# Allegro board GW_LORA.brd
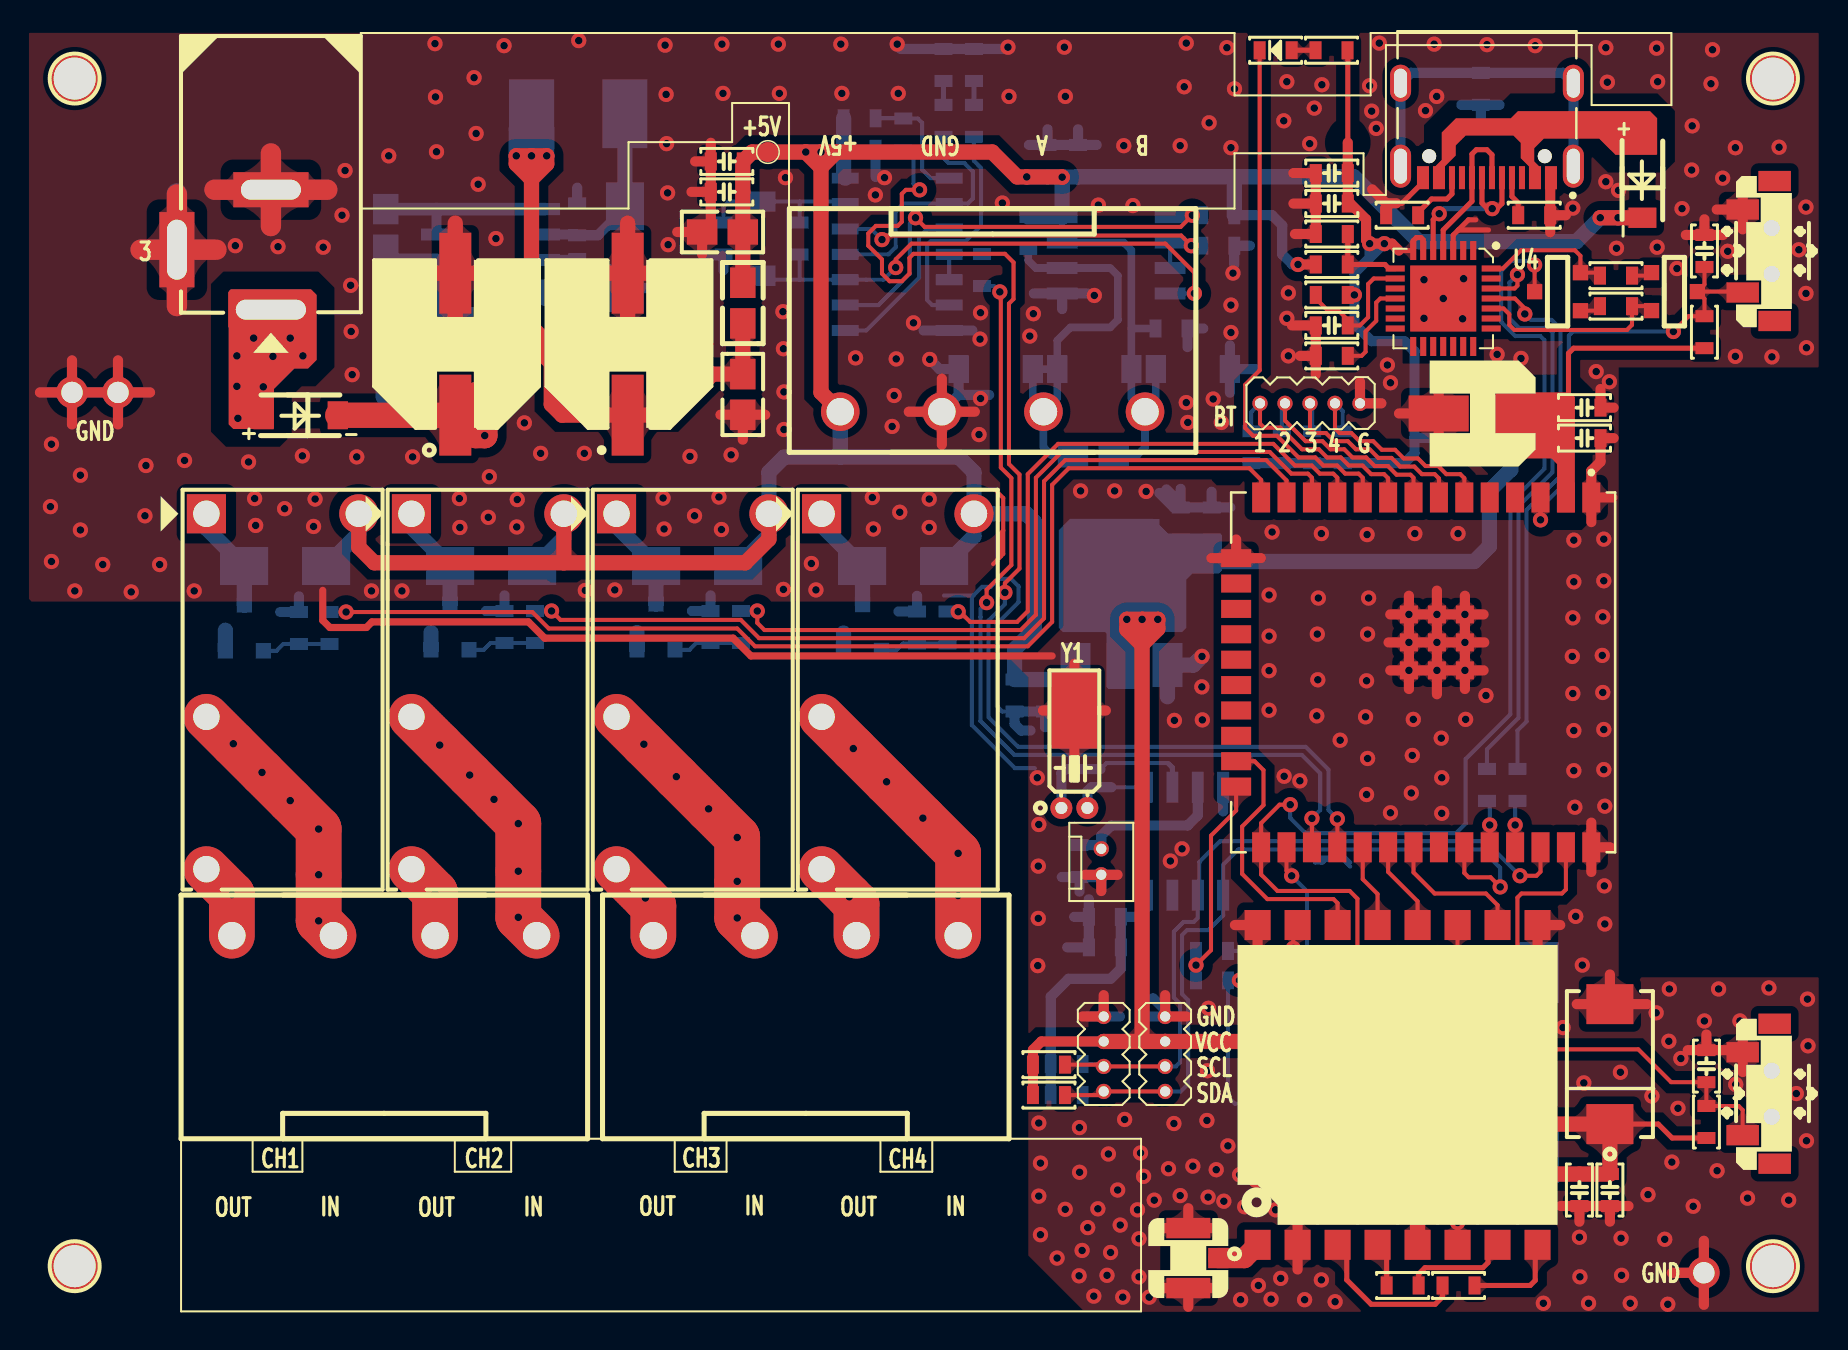
[diagram p0: board, top side]
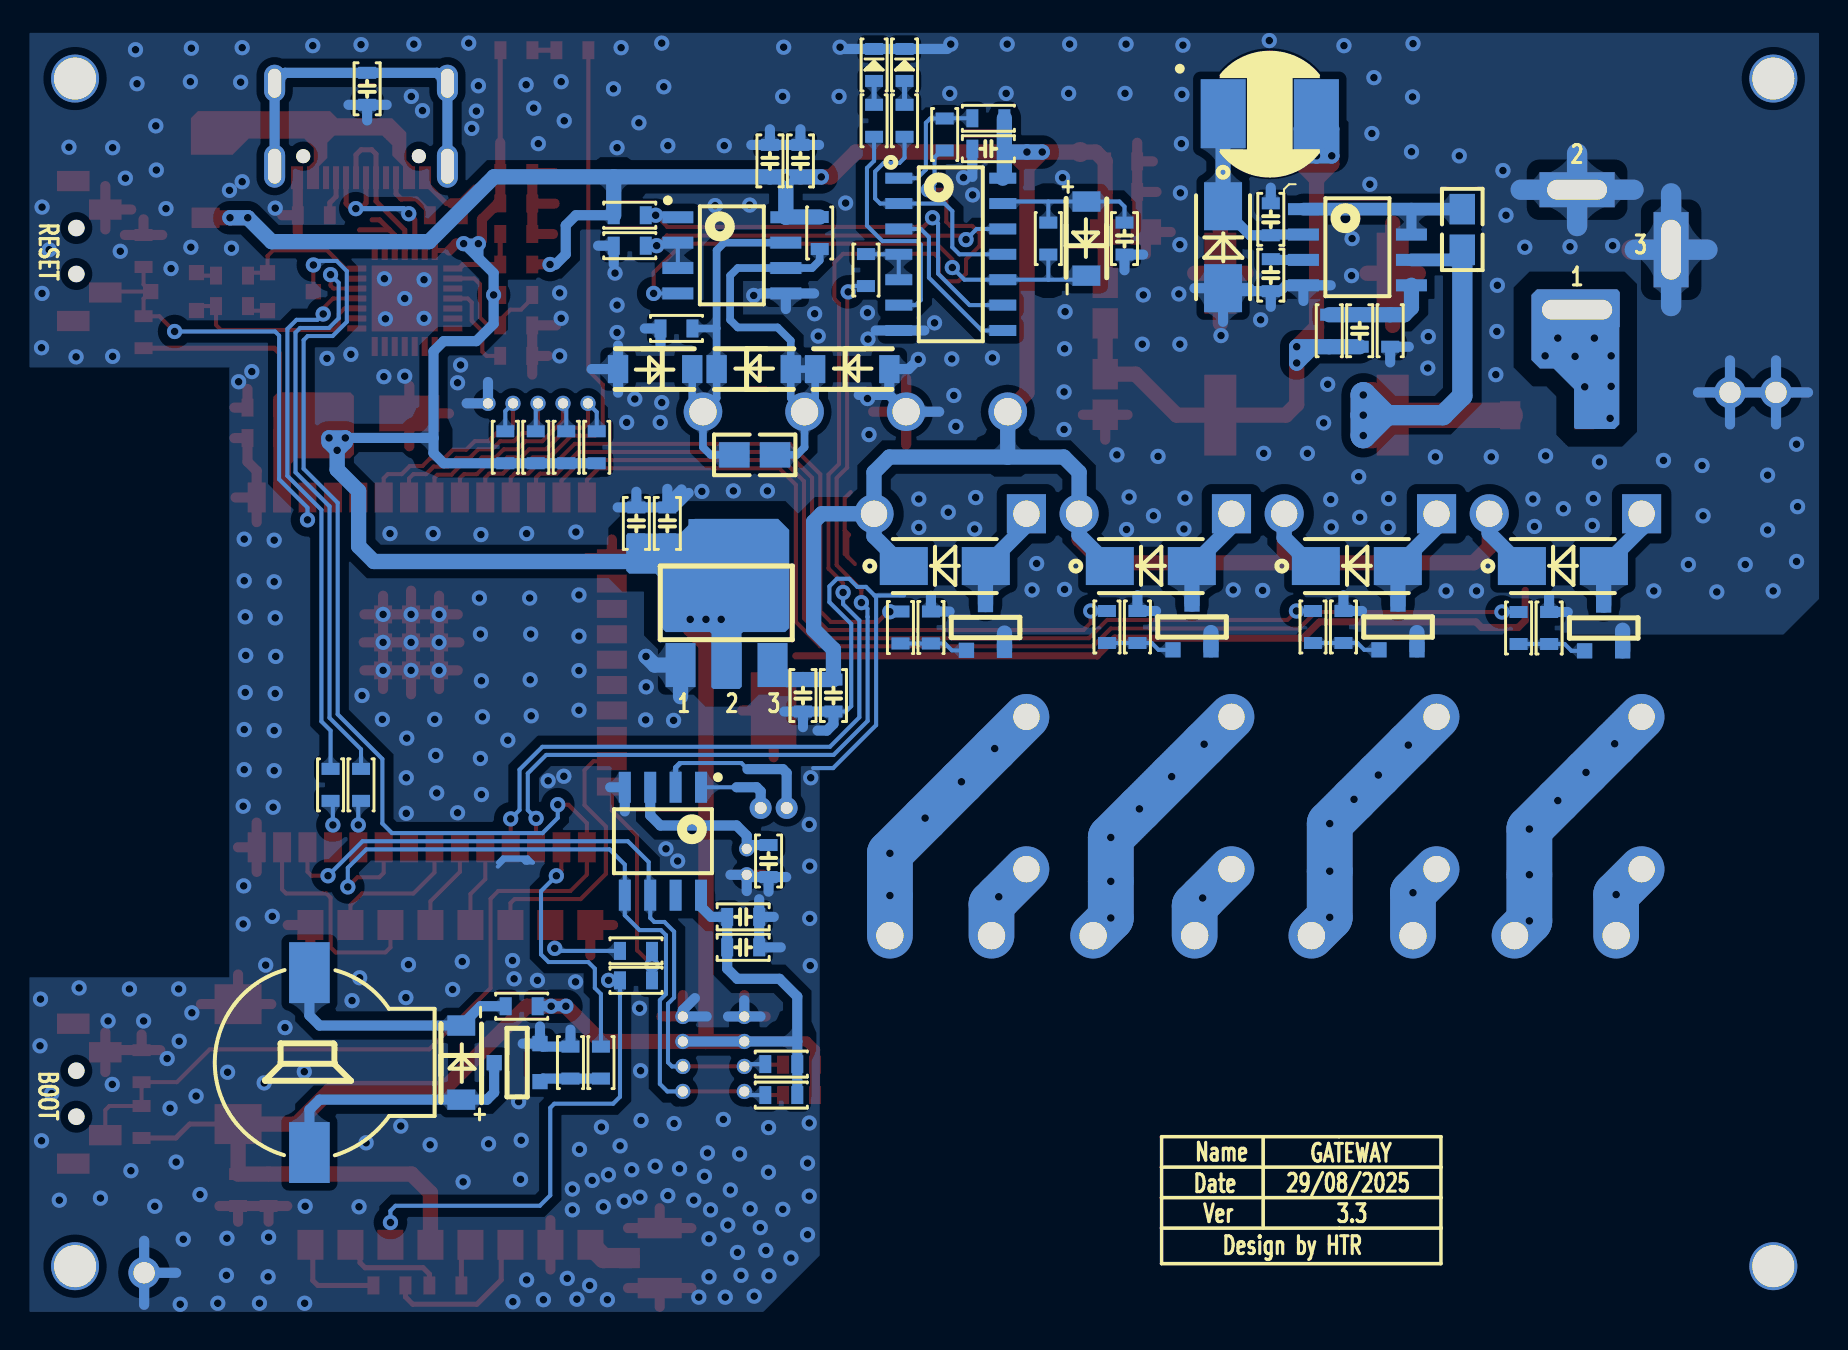
[diagram p1: board, bottom side, seen from below]

No outline. copper layers: TOP, BOTTOM. Coordinates in mm from the lowest, leftmost part position.

## Design rules (mm)
constraint set DEFAULT: min track width 0.203

## Placement (name value [footprint] x y rotation side)
B1  Through SMD  [BUZZER_SMD]  75.74 12.73 270 bottom
C1  0.1uF  [C0603]  52.71 57.84 90 bottom
C2  0.1uF  [C0603]  51.19 57.84 90 bottom
C3  1uF  [C0603]  41.79 58.45 0 bottom
C4  33pF  [C0603]  34.98 53.95 270 bottom
C6  1uF  [C0603]  78.04 43.97 0 top
C7  0.1uF  [C0603]  78.04 45.49 0 top
C8  0.1uF  [C0603]  84.03 53.33 90 top
C9  0.1uF  [C0603]  84.13 12.55 90 top
C10  1uF  [C0603]  65.4 55.7 180 top
C11  0.1uF  [C0603]  65.4 57.23 180 top
C12  0.1uF  [C0603]  72.85 61.44 270 bottom
C13  0.1uF  [C0603]  65.4 49.61 180 top
C14  0.1uF  [C0603]  77.78 6.35 270 top
C15  1uF  [C0603]  79.31 6.35 270 top
C16  100uF  [C2312]  79.31 12.65 90 top
C17  470uF  [RAD_SIZE_F]  30.19 48.67 90 top
C18  10uF  [C0805]  35.95 46.15 0 top
C19  10uF  [C0805]  34.93 54.28 270 top
C20  0.1uF  [C0603]  35.15 56.29 180 top
C21  0.001uF  [C0603]  35.15 57.81 180 top
C22  470pF  [C0603]  27.67 54.91 90 bottom
C23  100pF  [C0603]  23.22 49.34 90 bottom
C24  470pF  [C0603]  27.67 52.12 270 bottom
C25  0.1uF  [C0603]  49.54 31.09 270 bottom
C26  1uF  [C0603]  51.06 31.09 270 bottom
C27  0.1uF  [C0603]  59.39 39.7 90 bottom
C28  1uF  [C0603]  57.84 39.7 90 bottom
C29  10uF  [RAD_SIZE_C]  72.94 45.2 180 top
C30  0.1uF  [C0603]  54.05 20.02 180 bottom
C31  470uF  [RAD_SIZE_F]  21.57 48.67 90 top
C32  1uF  [C0603]  54.05 18.49 0 bottom
C33  1uF  [C0603]  52.78 22.81 270 bottom
D4  1N4148  [SOD_123]  36.89 53.95 270 bottom
D5  0603  [D0603]  47.51 62.64 90 bottom
D6  0603  [D0603]  45.98 62.64 90 bottom
D7  1N4148  [SOD_123]  80.93 56.85 270 top
D8  1N4148  [SOD_123]  13.84 45.11 0 top
D9  RB050L  [DO_214AC]  30.06 53.52 270 bottom
D10  0805  [D0603]  62.59 63.37 180 top
D11  1N4148  [SOD_123]  68.15 12.73 90 bottom
D12  1N4007WDITR  [DO_214AC]  13.06 37.57 180 bottom
D13  1N4007WDITR  [DO_214AC]  33.67 37.57 180 bottom
D14  1N4007WDITR  [DO_214AC]  23.37 37.57 180 bottom
D15  1N4007WDITR  [DO_214AC]  43.97 37.57 180 bottom
D16  1N4148  [SOD_123]  48.6 47.42 0 bottom
D17  1N4148  [SOD_123]  58.45 47.42 180 bottom
D18  1N4148  [SOD_123]  53.53 47.42 0 bottom
J2  DC_Jack  [CON_PJ-002A]  12.35 50.39 270 top
J3  HEADER1X4  [HEADER1X4_125]  57.07 13.16 90 top
J4  HEADER1X4  [HEADER1X4_125]  54 13.16 90 top
J5  Domino4PinRA  [DOMINO4_200_RA]  18.02 19.08 0 top
J6  Domino4PinRA  [DOMINO4_200_RA]  48.44 45.29 180 top
J7  Domino4PinRA  [DOMINO4_200_RA]  39.09 19.08 0 top
J8  TYPE C  [TYPE-C-16P]  73.16 61.72 180 top
J9  Bat  [HEADER1X2_127_ZH_TH]  53.87 22.12 270 top
J10  HEADER1X5  [HEADER1X5_125]  64.31 45.71 0 top
L1  100uH  [CHOKESIZE6MM]  27.72 60.2 180 bottom
L2  100MHz/100Ohm  [L0805]  35.95 49.71 180 top
NOREF  -  []  0 64.5 0 top
NOREF#2  -  [unnamed#2]  2.54 2.54 0 top
NOREF#3  -  []  0 0 90 top
NOREF#4  -  [unnamed#2]  2.54 61.96 0 top
NOREF#5  -  [unnamed#2]  87.46 61.96 0 top
NOREF#6  -  [unnamed#2]  87.46 2.54 0 top
Q1  MMBT2222  [SOT_23]  81.39 52.25 270 top
Q2  MMBT2222  [SOT_23]  77.83 50.34 90 top
Q3  MMBT2222  [SOT_23]  64.21 11.77 90 bottom
Q4  MMBT2222  [SOT_23]  11.98 33.32 180 bottom
Q5  MMBT2222  [SOT_23]  32.56 33.38 180 bottom
Q6  MMBT2222  [SOT_23]  22.26 33.38 180 bottom
Q7  MMBT2222  [SOT_23]  42.88 33.35 180 bottom
R1  120  [R0805]  53.47 43.13 90 bottom
R2  10K  [R0603]  59.72 55.12 180 bottom
R3  10K  [R0603]  50.22 54.23 270 bottom
R4  10K  [R0603]  59.72 53.59 0 bottom
R5  10K  [R0603]  57.39 49.45 0 bottom
R6  10K  [R0603]  41.79 59.97 0 bottom
R7  56K  [R0603]  38.79 53.95 270 bottom
R8  2.2K  [R0603]  47.51 59.84 90 bottom
R9  2.2K  [R0603]  45.98 59.84 90 bottom
R10  0  [R0603]  74.68 26.62 90 bottom
R11  10K  [R0603]  84.03 49.27 270 top
R12  10K  [R0603]  84.13 9.75 270 top
R13  0  [R0603]  73.16 26.62 90 bottom
R14  10K  [R0603]  79.61 52.1 0 top
R15  10K  [R0603]  79.61 50.57 0 top
R16  10K  [R0603]  65.4 52.65 0 top
R17  10K  [R0603]  65.4 48.08 0 top
R18  10K  [R0603]  65.4 54.18 180 top
R19  1K  [R0603]  65.4 51.13 0 top
R20  0  [R0603]  43.97 59.16 90 bottom
R21  0  [R0603]  47.91 52.37 90 bottom
R22  0  [R0603]  59.41 18.31 180 bottom
R23  0  [R0603]  68.94 1.57 0 top
R24  0  [R0603]  71.74 1.57 0 top
R25  0  [R0603]  59.41 16.84 0 bottom
R26  0.33  [R0805]  18.09 54.41 0 bottom
R27  4.7K  [R0603]  24.75 49.34 90 bottom
R28  1.5K  [R0603]  21.7 49.34 270 bottom
R29  4k7  [R0603]  51.26 12.62 0 top
R30  4k7  [R0603]  51.26 11.1 0 top
R31  10K  [R0603]  52.15 11.1 0 bottom
R32  2.2K  [R0603]  65.39 63.37 180 top
R33  10  [R0603]  65.13 15.54 0 bottom
R34  2k2  [R0603]  61.16 12.73 270 bottom
R35  10K  [R0603]  62.69 12.73 90 bottom
R36  RELAY_G6B  [RELAY_SPST_20MX10MX10M]  12.94 31.29 270 top
R37  2k2  [R0603]  15.28 34.47 90 bottom
R38  10K  [R0603]  13.75 34.47 90 bottom
R39  RELAY_G6B  [RELAY_SPST_20MX10MX10M]  33.44 31.29 270 top
R40  2k2  [R0603]  35.86 34.52 90 bottom
R41  10K  [R0603]  34.34 34.52 90 bottom
R42  RELAY_G6B  [RELAY_SPST_20MX10MX10M]  23.19 31.29 270 top
R43  2k2  [R0603]  25.56 34.52 90 bottom
R44  10K  [R0603]  24.04 34.52 90 bottom
R45  RELAY_G6B  [RELAY_SPST_20MX10MX10M]  43.7 31.29 270 top
R46  2k2  [R0603]  46.19 34.49 90 bottom
R47  10K  [R0603]  44.66 34.49 90 bottom
R48  5.1K  [R0603]  75.52 55.12 0 top
R49  5.1K  [R0603]  68.92 55.12 180 top
R50  10K  [R0603]  61.37 43.51 90 bottom
R51  10K  [R0603]  62.9 43.51 90 bottom
R52  10K  [R0603]  64.42 43.51 90 bottom
R53  10K  [R0603]  65.95 43.51 90 bottom
R54  10K  [R0603]  52.15 12.65 0 bottom
SW1  BUTTON  [BUTTON_SMD_2PIN_3X6X3_5_RA]  87.4 11.17 270 top
SW2  BUTTON  [BUTTON_SMD_2PIN_3X6X3_5_RA]  87.4 53.33 270 top
T3  +5V  [TESTPOINT_SIG]  37.2 58.28 0 top
T5  GND  [TEST_POINT_PWR]  2.41 46.25 0 top
T6  GND  [TEST_POINT_PWR]  4.71 46.25 0 top
T7  GND  [TEST_POINT_PWR]  84.01 2.21 0 top
U1  SN75176B  [SOIC8]  54.62 53.11 180 bottom
U2  74HC04D  [SOIC_14]  43.67 53.16 180 bottom
U3  -  [ESP32_WROOM_32U]  69.97 32.25 270 top
U4  CP2102  [QFN28_5X5]  70.97 50.95 270 top
U5  SMD_MINI  [ANTENNA_MOUNT]  58.22 2.95 0 top
U6  RFM98_433/RFM22B_433  [RFM22B_S2]  68.69 11.61 90 top
U7  MC34063  [SOIC8]  23.34 53.52 180 bottom
U8  AMS1117-3V3  [SOT_223_3]  57.18 32.61 180 bottom
U9  BQ32000  [SOIC8]  58.06 23.8 270 bottom
Y1  32.768kHz  [CRYTAL32KHZ]  52.53 25.46 0 top

## Library data of the parts
B1 = BUZZER
C1-C4 C6-C15 C20-C28 C30 C32 C33 = NPOL_CAP: User Part Number: ***
C16 C17 C29 C31 = POL_CAP
C18 C19 = NPOL_CAP
D4 D7 D8 D11 D16-D18 = DIODE
D5 D6 D10 = LED: User Part Number: ***
D9 D12-D15 = DIODE_AC
J2 = PWR_DC_TH
J3-J7 = HEADER1X4
J8 = TYPE_C_0
J9 = HEADER1X2
J10 = HEADER1X5
L1 = IND_FERRITE
L2 = BEAD: User Part Number: ***
Q1-Q7 = BJT_NPN
R1 R26 = RES
R2-R25 R27-R35 R37 R38 R40 R41 R43 R44 R46-R54 = RES: User Part Number: ***
R36 R39 R42 R45 = RELAY_G6B_0
SW1 SW2 = SW_PUSHBUTTON_SPST_2P
T3 T5-T7 = TestPoint
U1 = SN65176_2
U2 = 74HC04
U3 = ESP32_WROOM_32U
U4 = CP2102_QFN28_0
U5 = ANT_SMD_MINI
U6 = RFM69HCW
U7 = MC34063_2
U8 = LM1117X_4P
U9 = DS1307_8P
Y1 = XM_SM_2

## Footprints (pads in the part's own frame, mm; a bottom-side part is the same pattern mirrored in y, then rotated)
ANTENNA_MOUNT
  rect 2.2x1.021 smd: 1(0,1.5) 2(0,-1.5)
  rect 1.016x1.016 smd: 3(1.5,0)
BUTTON_SMD_2PIN_3X6X3_5_RA
  round 0.838 hole 0.813: (-1.15,0) (1.15,0)
  rect 1.016x1.626 smd: 1(-2.075,-1.45) 2(2.075,-1.45) 3(-3.5,0.15) 4(3.5,0.15)
BUZZER_SMD
  rect 3.048x2.032 smd: 1(-4.5,0) 2(4.5,0)
C0603
  rect 0.599x0.899 smd: 1(-0.8,0) 2(0.8,0)
C0805
  rect 1.27x1.524 smd: 1(0,1.016) 2(0,-1.016)
C2312
  rect 1.999x2.349 smd: 1(-3,0) 2(3,0)
CHOKESIZE6MM
  rect 2.25x3.449 smd: 1(-2.33,0) 2(2.33,0)
CON_PJ-002A
  rect 1.753x4.267 hole 0.991x3.505: 1(0,0)
  rect 1.753x3.759 hole 0.991x2.997: 2(-6,0)
  rect 3.759x1.753 hole 2.997x0.991: 3(-3,-4.7)
CRYTAL32KHZ
  round 1.1 hole 0.599: 1(-0.65,0) 2(0.65,0)
  rect 2.286x3.81 smd: 3(0,4.877)
D0603
  rect 0.599x0.899 smd: 1(-0.8,0) 2(0.8,0)
DO_214AC
  rect 2.4x1.9 smd: A(2.05,0) C(-2.05,0)
DOMINO4_200_RA
  round 1.93 hole 1.372: 1(-7.62,0) 2(-2.54,0) 3(2.54,0) 4(7.62,0)
ESP32_WROOM_32U
  rect 1.5x0.9 smd: 1(-8.75,8.41) 2(-8.75,7.14) 3(-8.75,5.87) 4(-8.75,4.6) 5(-8.75,3.33) 6(-8.75,2.06) 7(-8.75,0.79) 8(-8.75,-0.48) 9(-8.75,-1.75) 10(-8.75,-3.02) 11(-8.75,-4.29) 12(-8.75,-5.56) 13(-8.75,-6.83) 14(-8.75,-8.1) 25(8.75,-8.1) 26(8.75,-6.83) 27(8.75,-5.56) 28(8.75,-4.29) 29(8.75,-3.02) 30(8.75,-1.75) 31(8.75,-0.48) 32(8.75,0.79) 33(8.75,2.06) 34(8.75,3.33) 35(8.75,4.6) 36(8.75,5.87) 37(8.75,7.14) 38(8.75,8.41)
  rect 0.9x1.5 smd: 15(-5.715,-9.35) 16(-4.445,-9.35) 17(-3.175,-9.35) 18(-1.905,-9.35) 19(-0.635,-9.35) 20(0.635,-9.35) 21(1.905,-9.35) 22(3.175,-9.35) 23(4.445,-9.35) 24(5.715,-9.35)
  rect 0.9x0.9 smd: 39_1(-2.9,2.09) 39_2(-1.5,2.09) 39_3(-0.1,2.09) 39_4(-2.9,0.69) 39_5(-1.5,0.69) 39_6(-0.1,0.69) 39_7(-2.9,-0.71) 39_8(-1.5,-0.71) 39_9(-0.1,-0.71)
HEADER1X2_127_ZH_TH
  round 0.762 hole 0.508: 1(-1.305,0) 2(-0.005,0)
HEADER1X4_125
  round 0.762 hole 0.508: 1(-1.875,0) 2(-0.625,0) 3(0.625,0) 4(1.875,0)
HEADER1X5_125
  round 0.762 hole 0.508: 1(-2.5,0) 2(-1.25,0) 3(0,0) 4(1.25,0) 5(2.5,0)
L0805
  rect 1.27x1.524 smd: 1(0,0) 2(0,-2.032)
QFN28_5X5
  rect 0.95x0.305 smd: 1(-2.4,1.5) 2(-2.4,1) 3(-2.4,0.5) 4(-2.4,0) 5(-2.4,-0.5) 6(-2.4,-1) 7(-2.4,-1.5) 15(2.4,-1.5) 16(2.4,-1) 17(2.4,-0.5) 18(2.4,0) 19(2.4,0.5) 20(2.4,1) 21(2.4,1.5)
  rect 0.305x0.95 smd: 8(-1.5,-2.4) 9(-1,-2.4) 10(-0.5,-2.4) 11(0,-2.4) 12(0.5,-2.4) 13(1,-2.4) 14(1.5,-2.4) 22(1.5,2.4) 23(1,2.4) 24(0.5,2.4) 25(0,2.4) 26(-0.5,2.4) 27(-1,2.4) 28(-1.5,2.4)
  rect 3.302x3.302 smd: 29(0,0)
R0603
  rect 0.599x0.899 smd: 1(-0.8,0) 2(0.8,0)
R0805
  rect 1.27x1.524 smd: 1(0,1.016) 2(0,-1.016)
RAD_SIZE_C
  rect 3x1.8 smd: 1(-2.2,0) 2(2.2,0)
RAD_SIZE_F
  rect 4.049x1.6 smd: 1(-3.55,0) 2(3.55,0)
RELAY_SPST_20MX10MX10M
  rect 1.956x1.956 hole 1.321: 1(-8.89,-3.81)
  round 1.956 hole 1.321: 2(-8.89,3.81) 3(1.27,-3.81) 4(8.89,-3.81)
RFM22B_S2
  rect 1.501x1.301 smd: 1(-8,7) 2(-8,5) 3(-8,3) 4(-8,1) 5(-8,-1) 6(-8,-3) 7(-8,-5) 8(-8,-7) 9(8,-7) 10(8,-5) 11(8,-3) 12(8,-1) 13(8,1) 14(8,3) 15(8,5) 16(8,7)
SOD_123
  rect 1.016x1.397 smd: 1(-1.854,0) 2(1.854,0)
SOIC8
  rect 1.549x0.599 smd: 1(-2.7,1.905) 2(-2.7,0.635) 3(-2.7,-0.635) 4(-2.7,-1.905) 5(2.7,-1.905) 6(2.7,-0.635) 7(2.7,0.635) 8(2.7,1.905)
SOIC_14
  rect 1.349x0.551 smd: 1(-2.6,3.81) 2(-2.6,2.54) 3(-2.6,1.27) 4(-2.6,0) 5(-2.6,-1.27) 6(-2.6,-2.54) 7(-2.6,-3.81) 8(2.6,-3.81) 9(2.6,-2.54) 10(2.6,-1.27) 11(2.6,0) 12(2.6,1.27) 13(2.6,2.54) 14(2.6,3.81)
SOT_23
  rect 0.762x0.762 smd: 1(0,0) 2(1.9,0) 3(0.95,2.291)
SOT_223_3
  rect 1.5x2.2 smd: 1(0,0) 2(2.3,0) 3(4.6,0)
  rect 3.81x2.007 smd: 4(2.3,6.3)
TEST_POINT_PWR
  round 1.575 hole 1.067: 1(0,0)
TESTPOINT_SIG
  round 1.001 smd: 1(0,0)
TYPE-C-16P
  round 0.7 hole 0.7 unplated: (-2.89,3.65) (2.89,3.65)
  rect 0.6x1.15 smd: A1_B12(-3.2,4.725) A4_B9(-2.4,4.725) A9_B4(2.4,4.725) A12_B1(3.2,4.725)
  rect 0.3x1.15 smd: A5(-1.25,4.725) A6(-0.25,4.725) A7(0.25,4.725) A8(1.25,4.725) B5(1.75,4.725) B6(0.75,4.725) B7(-0.75,4.725) B8(-1.75,4.725)
  oval 1.05x1.85 hole 0.65x1.45: SH1(-4.32,0) SH2(4.32,0)
  oval 1.05x2.15 hole 0.65x1.75: SH3(-4.32,4.15) SH4(4.32,4.15)
unnamed#2
  round 2.4 hole 2.1: (0,0)

## Nets
+3.3V: C6.1 C7.1 C10.1 C11.1 C14.1 C15.1 C16.1 C27.1 C28.1 C29.1 C30.1 C32.2 J3.3 J4.3 R11.2 R12.2 R19.2 R29.1 R30.1 R31.1 R32.1 R33.1 R50.1 R51.1 R52.1 R53.1 R54.1 U3.2 U4.6(VDD) U4.7 U6.5(VCC) U8.2 U8.4(OUT_PAD) U9.8
+5V: C1.1 C2.1 C3.1 C19.1 C20.1 C21.1 C25.1 C26.1 D7.2(CATHODE) D12.C(CATHODE) D13.C(CATHODE) D14.C(CATHODE) D15.C(CATHODE) J6.4 L2.2 R2.1 R3.1 R6.1 R16.1 R36.2 R39.2 R42.2 R45.2 T3.1(T) U1.8(VCC) U2.14 U8.3
GND: C1.2 C2.2 C3.2 C4.2 C6.2 C7.2 C8.2 C9.2 C10.2 C11.2 C12.2 C13.2 C14.2 C15.2 C16.2 C17.2 C18.2 C19.2 C20.2 C21.2 C22.2 C24.2 C25.2 C26.2 C27.2 C28.2 C29.2 C30.2 C31.2 C32.1 C33.2 D5.2(CATHODE) D6.2(CATHODE) D9.A D16.1 D17.1 J2.2 J2.3 J3.4 J4.4 J6.3 J8.A1_B12 J8.A12_B1 J9.2 J10.5 Q3.2 Q4.2 Q5.2 Q6.2 Q7.2 R4.2 R5.2 R17.1 R18.2 R28.2 R35.2 R38.2 R41.2 R44.2 R47.2 R48.2 R49.2 SW1.1 SW2.1 T5.1(T) T6.1(T) T7.1(T) U1.5 U2.7 U3.1 U3.15 U3.38 U3.39_1 U3.39_2 U3.39_3 U3.39_4 U3.39_5 U3.39_6 U3.39_7 U3.39_8 U3.39_9 U4.3 U4.29 U5.1 U5.2(GND1) U6.2 U6.9 U6.16 U7.4 U8.1 U9.4 Y1.3
VBUS: D7.1 J8.A4_B9 J8.A9_B4(VBUS#A9_B4)
BTN1: J10.1 R50.2 U3.9
BTN2: J10.2 R51.2 U3.8
BTN3: J10.3 R52.2 U3.7
BTN4: J10.4 R53.2 U3.6
BUZZER: R34.1 U3.26
D+: J8.A6 J8.B6 U4.4
D-: J8.A7 J8.B7 U4.5
DTR: Q2.2 R14.1 U4.28
EN: C8.1 Q1.3(E) R11.1 SW2.2 U3.3
IO0_BOOT: C9.1 Q2.3(E) R12.1 SW1.2 U3.25
IO13: U3.16
LED: D10.2(CATHODE) U3.10
LORA_IO0: R22.2 R25.1 U3.24
LORA_MISO: U3.31 U6.10
LORA_MOSI: U3.37 U6.11
LORA_RST: U3.23 U6.14
LORA_SCK: U3.30 U6.12
LORA_SS: U3.29 U6.13
N15797829_RELAY: D12.A Q4.3(E) R36.1(DC-)
N15797829_RELAY1: D14.A Q6.3(E) R42.1(DC-)
N15797829_RELAY2: D13.A Q5.3(E) R39.1(DC-)
N15797829_RELAY3: D15.A Q7.3(E) R45.1(DC-)
N15797919_RELAY: Q4.1 R37.1 R38.1
N15797919_RELAY1: Q6.1 R43.1 R44.1
N15797919_RELAY2: Q5.1 R40.1 R41.1
N15797919_RELAY3: Q7.1 R46.1 R47.1
RELAY1: R37.2 U3.14
RELAY2: R43.2 U3.13
RELAY3: R40.2 U3.12
RELAY4: R46.2 U3.11
RS485_A: D16.2(CATHODE) D18.1 J6.2 R1.2 R3.2 U1.6
RS485_B: D17.2(CATHODE) D18.2(CATHODE) J6.1 R1.1 R5.1 U1.7
RST: Q1.2 R15.2 U4.24
RX: R10.2 U4.25
RXD0: R13.1 U3.34
SCL: J3.2 J4.2 R29.2 R54.2 U3.36 U9.6
SDA: J3.1 J4.1 R30.2 R31.2 U3.33 U9.5
SSN: U3.5
SSP: U3.4
TX: R13.2 U4.26
TXD0: R10.1 U3.35(TXD0/IO1)
N15649130: U9.1 Y1.2(XTAL2)
N15649228: U9.2(X2) Y1.1
N15649288: C33.1 J9.1 U9.3
N15674543: R2.2 U1.1 U2.9
N15674655: D4.2(CATHODE) R7.2 U1.4 U2.10
N15674667: C4.1 D4.1 R7.1 U2.13
N15674675: R4.1 U1.2 U1.3 U2.12(Y)
N15674829: U2.3 U2.8
N15675017: R8.1 U2.6
N15675087: R9.1 U2.2 U2.11
N15728950: D10.1 R32.2
N15737205: B1.1 D11.2(CATHODE) R33.2
N15737229: B1.2(-) D11.1 Q3.3(E)
N15737285: Q3.1 R34.2 R35.1
N15759470: U5.3 U6.1
N15759516: R22.1 U6.15
N15759538: R24.1 U6.3
N15759564: R23.1 U6.4
N15759656: R25.2 U6.6
N15759710: R23.2 U6.7
N15759734: R24.2 U6.8
N15854375: R21.1 U3.27
N15854391: R21.2 U2.4 U2.5
N15854393: R6.2 R20.2 U2.1
N15855154: R20.1 U3.28
N15856484: J5.1 R36.4
N15856490: J5.2 R36.3
N15856535: J5.4 R42.3
N15860706: D8.1 J2.1(IN)
N15877200: Q1.1 R14.2
N15877354: Q2.1 R15.1
N15882155: R17.2 U4.11
N15882358: R16.2 R18.1 U4.8
N15882934: C13.1 R19.1 U4.9
N15886999: C12.1 J8.SH1 J8.SH2 J8.SH3 J8.SH4
N15887556: J8.A5 R48.1
N15888167: J8.B5 R49.1
N15920757: C31.1 D8.2(CATHODE) R26.1 U7.6(VCC)
N15920801: C22.1 D9.C(CATHODE) L1.1 U7.2
N15920825: C17.1 C18.1 C23.1 L1.2 L2.1 R27.1
N15920977: R26.2 U7.1 U7.7 U7.8
N15921109: C23.2 R27.2 R28.1 U7.5
N15921113: C24.1 U7.3
N15922447: J5.3 R42.4
N15922496: J7.1 R39.4
N15922505: J7.2 R39.3
N15922517: J7.4 R45.3
N15922524: J7.3 R45.4
N156751311: D5.1 R8.2
N156751471: D6.1 R9.2

Pads without a net: J8 A8 B8; SW1 3 4; SW2 3 4; U3 17 18 19 20 21 22 32; U4 1 2 10 12 13 14 15 16 17 18 19 20 21 22 23 27; U9 7

## Via types
v1: diameter 0.762, hole 0.381, TOP to BOTTOM, 462 vias

## Routing (per net, layer and track width the routed paths; a pad name or vN(x,y) marks a point on that pad's centre or on a via; arc(x,y) is an arc through that point)
+3.3V: length 178.7
  TOP w0.254: R11.2 77.49,48.47 77.24,48.21 C7.1 ; R32.1 66.2,63.36 66.2,58.75 ; R12.2 82.42,8.95 81.72,9.65 C16.1 ; 68.75,53.35 U4.7 69.47,53.84 69.63,54 69.86,54 69.97,53.89 U4.6
  TOP w0.508: 66.2,58.75 C11.1 C10.1 66.33,55.7 67.11,54.91 67.11,53.87 v1(67.29,53.7) v1(68.03,53.7) 68.41,53.7 68.75,53.35 ; v1(66.53,51.13) R19.2 ; J4.3 50.88,13.78 50.46,13.36 R29.1 R30.1 ; v1(73.95,43.98) 73.95,43.76 v1(74.35,43.36) 74.35,43.57 v1(74.76,43.98) v1(73.95,43.98)
  TOP w0.762: 55.91,33.62 55.91,33.64 ; 55.91,33.62 55.91,13.78 ; 55.91,33.62 55.15,34.38 v1(55.15,34.9) v1(55.91,34.9) ; 55.91,33.64 56.7,34.42 v1(56.7,34.9) v1(55.91,34.9) ; 55.91,33.64 v1(55.91,34.9) ; 55.91,13.78 J4.3 ; 55.91,13.78 J3.3 61.15,13.78 v1(62.92,15.54) v1(63.65,15.54) 64.87,15.54 68.99,11.43 74.61,11.43 76.39,9.65 C16.1 C15.1 C14.1 70.63,7.15 69.69,6.21 U6.5
  BOTTOM w0.508: 69.54,43.98 69.54,48.31 69.03,48.82 67.39,48.82 66.53,49.68 v1(66.53,51.13) 66.53,52.22 67.29,52.98 ; 69.54,43.98 69.54,43.22 69.03,42.71 R53.1 R52.1 R51.1 R50.1 ; 69.54,43.98 v1(73.95,43.98) ; R33.1 v1(63.65,15.54) v1(62.92,15.54) ; J3.3 J4.3 51.35,13.78 ; 67.29,52.98 v1(67.29,53.7) 68,53.7 ; 67.29,52.98 68,53.7 ; 68,53.7 v1(68.03,53.7) ; R31.1 R54.1 51.35,13.78 ; U9.8 56.16,20.52 55.65,20.02 C30.1 C32.2 54.85,17.42 54.34,16.92 52.24,16.92 51.35,16.03 51.35,13.78
  BOTTOM w0.762: v1(74.35,43.36) 74.76,43.76 v1(74.76,43.98) v1(73.95,43.98) 73.95,43.76 v1(74.35,43.36) ; v1(74.35,43.36) 74.35,42.39 73.28,41.32 73.28,38.56 72.52,37.8 57.96,37.8
+5V: length 160.5
  TOP w0.508: v1(63.71,52.65) R16.1
  TOP w0.762: v1(51.92,57.02) 51.9,57.04 v1(50.15,57.04) 49.66,57.04 48.42,58.28 40.62,58.28 ; R36.2 16.75,38.51 17.52,37.73 27,37.73 ; 40.62,58.28 v1(39.86,58.28) ; 40.62,58.28 39.86,57.52 ; v1(39.86,58.28) v1(39.1,58.28) ; v1(39.86,58.28) 39.86,57.52 ; 39.86,57.51 39.1,58.27 v1(39.1,58.28) ; 39.86,57.51 39.86,57.52 ; 39.86,57.51 39.86,46.25 J6.4 ; R42.2 27,37.73 ; 27,37.73 36.08,37.73 37.25,38.91 R39.2 ; v1(39.1,58.28) T3.1 36.42,58.28 C21.1 C20.1 C19.1 L2.2 ; D7.2 v1(79.71,54.99) v1(78.82,54.99)
  BOTTOM w0.508: R2.1 62.42,55.12 62.92,54.61 62.92,53.16 63.43,52.65 v1(63.71,52.65)
  BOTTOM w0.762: 40.82,43.02 J6.4 40.75,45.21 ; 40.82,43.02 46.75,43.02 47.51,42.26 R45.2 ; 40.82,43.02 38.02,43.02 37.25,42.26 R39.2 37.25,39.1 D13.C ; U2.14 40.99,57.05 C3.1 ; R45.2 47.51,39.05 D15.C ; R45.2 50.12,40.18 50.53,39.78 50.53,34.39 49.54,33.4 C25.1 C26.1 51.86,31.89 U8.3 ; 60.52,57.04 66.51,57.04 69.76,53.8 77.63,53.8 v1(78.82,54.99) v1(79.71,54.99) ; 60.52,57.04 R2.1 ; 60.52,57.04 52.72,57.04 C1.1 51.93,57.04 v1(51.92,57.02) ; v1(51.92,57.02) U1.8 51.9,55.03 R3.1 ; v1(51.92,57.02) 51.9,57.04 C2.1 v1(50.15,57.04) ; C3.1 40.83,58.28 v1(39.86,58.28) v1(39.1,58.28) ; C3.1 R6.1 ; R36.2 16.75,39.2 D12.C ; R42.2 27,38.98 25.59,37.57 D14.C
GND: length 397.4
  TOP w0.203: 48.97,39.34 48.97,40.97 48.67,41.27 ; 48.97,39.34 48.76,39.13 48.84,39.04 48.84,38.05 ; 48.97,39.34 48.97,38.18 48.84,38.05 ; 48.84,38.05 48.46,37.67
  TOP w0.254: 71.73,54.38 72.24,54.89 72.6,54.89 ; 71.73,54.38 71.47,54.12 U4.3 ; 71.73,54.38 73.24,54.38 ; J8.A12_B1 69.96,56.77 68.91,55.71 68.63,55.71
  TOP w0.356: 51.42,33.07 36.35,33.07 35.47,33.96 26.04,33.96 25.23,34.77 17.41,34.77 17.13,34.49 15.3,34.49 14.95,34.85 14.95,36.35
  TOP w0.508: C10.2 C11.2 63.48,57.23 ; C10.2 R18.2 63.56,54.18 ; C10.2 63.48,55.7 ; J6.3 45.9,43.64 ; J6.3 47.55,45.29 ; J6.3 44.25,45.29 ; J6.3 45.9,46.94 ; 85.95,56.58 SW2.1 ; SW2.1 85.95,54.41 ; SW2.1 84.65,55.4 ; 58.14,15.03 J3.4 57.07,16.1 ; v1(70.66,35.15) v1(69.26,35.15) ; v1(70.66,35.15) v1(72.06,35.15) ; v1(70.66,35.15) v1(70.66,33.75) ; v1(70.66,35.15) 70.66,36.34 ; v1(69.26,35.15) 69.26,36.08 ; v1(69.26,35.15) v1(69.26,33.75) ; v1(69.26,35.15) 68.32,35.15 ; Y1.3 50.95,30.34 ; Y1.3 52.53,28 ; Y1.3 52.53,32.68 ; Y1.3 54.1,30.34 ; C29.2 68.76,45.2 ; C29.2 70.74,43.56 ; C29.2 70.74,46.58 ; v1(72.06,35.15) 72.99,35.15 ; v1(72.06,35.15) 72.06,36.08 ; v1(72.06,35.15) v1(72.06,33.75) ; v1(70.66,33.75) v1(72.06,33.75) ; v1(70.66,33.75) v1(69.26,33.75) ; v1(70.66,33.75) v1(70.66,32.35) ; v1(72.06,33.75) v1(72.06,32.35) ; v1(72.06,33.75) 73.02,33.75 ; J9.2 53.06,22.12 ; J9.2 54.69,22.12 ; J9.2 53.87,21.31 ; 67.42,56.41 68.12,55.71 ; 68.12,55.71 R49.2 ; 68.12,55.71 68.63,55.71 ; R48.2 76.32,54.27 ; R48.2 76.32,56.96 J8.A1_B12 ; R48.2 77.1,55.12 ; v1(70.66,32.35) 70.66,31.15 ; v1(70.66,32.35) v1(72.06,32.35) ; v1(70.66,32.35) v1(69.26,32.35) ; 79.49,45.49 C7.2 78.84,46.42 ; C19.2 32.67,54.28 ; C19.2 34.35,54.71 C20.2 ; C19.2 33.92,53.16 ; T6.1 4.71,44.65 ; T6.1 4.71,47.85 ; T6.1 T5.1 ; T6.1 6.31,46.25 ; 63.69,4.84 U6.2 63.69,2.37 ; 63.41,49.61 C13.2 R17.1 ; C16.2 79.31,17.13 ; C16.2 77.65,15.65 ; C16.2 81.16,15.65 ; C15.2 80.24,5.55 ; C15.2 79.31,4.77 ; C15.2 C14.2 ; SW1.1 85.95,14.23 ; SW1.1 85.84,13.35 C9.2 ; SW1.1 85.95,12.25 ; T7.1 82.41,2.21 ; T7.1 84.01,0.61 ; T7.1 84.01,3.81 ; U5.1 58.22,5.44 ; U5.1 59.81,4.45 ; U5.1 56.64,4.45 ; R17.1 63.82,48.08 ; R17.1 64.6,47.15 ; v1(69.26,33.75) 68.24,33.75 ; v1(69.26,33.75) v1(69.26,32.35) ; 67.88,45.71 J10.5 66.81,46.77 ; v1(72.06,32.35) 72.99,32.35 ; v1(72.06,32.35) 72.06,31.42 ; T5.1 0.81,46.25 ; T5.1 2.41,47.85 ; T5.1 2.41,44.65 ; 54,16.1 J4.4 52.93,15.03 ; v1(69.26,32.35) 68.32,32.35 ; v1(69.26,32.35) 69.26,31.42 ; C21.2 C20.2 ; C21.2 34.35,58.74 ; C21.2 33.57,57.81 ; C20.2 33.38,56.29 ; U3.1 78.38,39.77 ; U3.1 79.43,41 ; U3.1 78.38,42.33 78.84,42.79 C6.2 79.49,43.97 ; C9.2 83.2,13.35 ; C9.2 84.13,14.13 ; U3.38 79.31,23.5 ; U3.38 78.38,22.27 ; U3.38 78.38,24.73 ; U5.2 59.81,1.45 ; U5.2 56.64,1.45 ; U5.2 58.22,0.51 ; 75.69,18.37 U6.9 76.82,19.61 ; C14.2 76.85,5.55 ; C14.2 77.78,4.77 ; U3.15 60.62,38.9 ; U3.15 59.38,37.96 ; U3.15 61.85,37.96 ; C18.2 34.83,45.14 ; C18.2 37.07,45.14 ; C18.2 35.95,43.89 ; C8.2 84.97,54.13 ; C8.2 84.03,54.91 ; C8.2 83.1,54.13 ; 61.69,18.09 U6.16 60.56,19.61
  TOP w0.762: C17.2 31.47,52.22 ; C17.2 28.91,52.22 ; C17.2 30.19,49.71 ; C17.2 30.19,54.72 ; C31.2 21.57,54.72 ; C31.2 21.57,49.61 ; C31.2 20.29,52.22 ; C31.2 22.85,52.22
  TOP w1.016: J2.2 12.35,58.21 ; J2.2 15.17,56.39 ; J2.2 12.35,54.58 ; J2.2 9.53,56.39 ; J2.3 5.84,53.39 ; J2.3 7.65,56.16 ; J2.3 7.65,50.57 ; J2.3 9.63,53.39
  BOTTOM w0.203: 64.85,22.73 64.99,22.88 65.1,22.88 ; 64.85,22.73 64.96,22.73 65.1,22.88 ; 64.85,22.73 64.57,22.73 64.82,22.99 66.07,22.99 66.32,22.73 ; 65.1,22.88 65.97,22.88 66.32,22.53 ; 47.48,36.09 47.91,36.53 48.34,36.53 48.75,36.93 49.36,36.93 49.74,36.55 49.74,35.76 48.65,34.67 48.65,30.56 48.92,30.29 C25.2 ; 47.48,36.09 46.01,36.09 ; 47.48,36.09 47.4,36.02 47.4,29.61 49.56,27.46 50.55,27.46
  BOTTOM w0.508: C28.2 C27.2 ; C28.2 57.84,40.69 ; C28.2 57.5,40.5 56.78,41.22 ; C27.2 60.33,40.5 ; C27.2 59.39,41.28 ; T5.1 2.41,44.65 ; T5.1 0.81,46.25 ; T5.1 T6.1 ; T5.1 2.41,47.85 ; 56.46,15.95 57.07,15.35 J3.4 55.88,15.03 ; 33.41,35.32 R41.2 34.34,36.1 ; 60.52,52.66 R4.2 61.31,53.59 ; 20.77,48.54 R28.2 21.7,47.76 ; 71.88,60.64 C12.2 ; C12.2 73.79,60.64 ; C12.2 72.85,59.86 ; 24.67,51.61 U7.4 ; U7.4 26.04,50.83 ; U7.4 26.91,51.61 27.2,51.32 C24.2 ; C1.2 53.64,58.64 ; C1.2 C2.2 ; C1.2 52.71,59.42 ; J4.4 54.81,15.03 ; J4.4 53.18,15.03 ; J4.4 54,15.85 ; v1(45.3,47.9) 45.78,47.42 D16.1 46.74,46.13 ; T7.1 84.01,0.61 ; T7.1 82.41,2.21 ; T7.1 84.01,3.81 ; 44.99,49.35 U2.7 47.43,49.35 ; 24.04,36.1 R44.2 23.1,35.32 ; 34.98,52.37 C4.2 34.05,53.15 ; C33.2 53.76,22.01 J9.2 ; C33.2 52.78,21.28 ; C33.2 51.9,22.01 ; C26.2 51.06,29.51 ; C26.2 51.99,30.29 ; C26.2 C25.2 49.54,29.67 49.87,29.34 50.33,29.34 ; Q3.2 64.06,13.53 R35.2 62.69,14.38 ; Q3.2 64.21,14.54 ; Q3.2 65.07,13.67 ; 43.73,35.29 R47.2 44.66,36.08 ; 43.84,63.44 D6.2 D5.2 49.19,63.44 ; 58.97,49.45 R5.2 58.19,48.52 ; T6.1 4.71,47.85 ; T6.1 6.31,46.25 ; T6.1 4.71,44.65 ; J9.2 53.87,21.31 ; J9.2 54.69,22.12 ; D9.A 28.75,51.47 28.6,51.32 ; D9.A 29.91,51.32 28.6,51.32 ; D9.A 30.06,49.78 ; D9.A 31.49,51.47 ; 50.5,51.21 U1.5 ; U1.5 51.92,50.42 ; U1.5 53.17,51.21 ; 28.6,51.32 C24.2 ; 57.84,40.69 57.84,41.43 ; 57.84,40.69 57.13,41.4 ; C24.2 27.67,50.54 ; 67.88,45.71 J10.5 66.81,46.77 ; C2.2 50.26,58.64 ; C2.2 51.19,59.42 ; 59.97,25.29 U9.4 60.7,26.5 ; 13.75,36.05 R38.2 12.82,35.27 ; 46.74,46.13 48.27,46.13 ; 46.74,46.13 J6.3 44.25,45.29 ; C3.2 42.59,57.04 ; C30.2 53.25,20.9 ; C30.2 52.52,20.02 ; C30.2 C32.1 52.17,18.49 ; C22.2 27.67,56.5 ; D17.1 60.31,48.6 ; D17.1 60.31,46.24 ; D17.1 61.63,47.42
  BOTTOM w0.762: 57.18,31.03 U8.1 58.48,32.61 v1(58.91,33.05) ; Q7.2 40.99,34.21 ; Q6.2 20.36,34.24 ; Q4.2 10.08,34.36 ; Q5.2 30.66,34.24
  BOTTOM w1.016: J2.3 7.65,56.21 ; J2.3 5.84,53.39 ; J2.3 7.65,50.57 ; J2.3 9.47,53.39 ; J2.2 9.53,56.39 ; J2.2 15.17,56.39 ; J2.2 12.35,58.21 ; J2.2 12.35,54.58
  vias: v1(1.33,40.54) v1(1.38,43.66) v1(1.38,37.8) v1(2.55,36.32) v1(2.83,42.11) v1(2.83,39.37) v1(3.94,37.64) v1(5.37,36.27) v1(6.1,42.6) v1(6.05,40.08) v1(6.79,37.64) v1(8.03,42.85) v1(8.52,36.32) v1(10.57,53.59) v1(11.23,42.77) v1(11.54,40.94) v1(11.59,39.6) v1(12.71,53.54) v1(13.04,40.44) v1(13.93,43.08) v1(14.49,39.55) v1(14.56,40.92) v1(14.97,53.52) v1(15.91,55.12) v1(16.06,57.35) v1(16.34,51.61) v1(16.37,49.3) v1(16.42,47.14) v1(16.64,43.03) v1(17.38,36.32) v1(18.24,58.09) v1(18.91,36.32) v1(19.44,43.03) v1(19.79,49.05) v1(19.82,47.47) v1(20.56,63.7) v1(20.58,61.04) v1(20.63,58.29) v1(21.78,40.94) v1(21.8,39.5) v1(22.51,62) v1(22.61,59.21) v1(22.72,56.67) v1(23.22,40.01) v1(23.27,42.04) v1(23.6,53.95) v1(23.63,52.1) v1(24.01,63.6) v1(24.65,39.52) v1(24.67,40.89) v1(24.82,46.66) v1(25.03,44.73) v1(25.84,43.21) v1(27.74,63.86) v1(28.02,43.21) v1(28.07,36.35) v1(28.18,49.89) v1(29.55,36.37) v1(30.16,49.1) v1(31.96,40.97) v1(32.01,39.42) v1(32.06,63.63) v1(32.11,61.16) v1(32.14,58.7) v1(32.19,56.24) v1(32.21,53.64) v1(32.21,48.67) v1(32.27,51.18) v1(33.31,43.05) v1(33.54,40.08) v1(34.04,51.13) v1(34.09,48.67) v1(34.75,41.02) v1(34.91,63.68) v1(34.88,39.4) v1(34.96,61.21) v1(35.36,43.13) v1(37.73,63.68) v1(37.78,61.21) v1(37.96,50.29) v1(37.98,48.44) v1(38.01,46.28) v1(38.01,44.4) v1(37.98,36.4) v1(38.08,57) v1(39.38,37.69) v1(39.61,36.37) v1(40.85,63.68) v1(40.9,61.21) v1(41.59,47.98) v1(42.43,41) v1(42.48,39.42) v1(42.58,56.13) v1(43.04,57) v1(43.42,44.55) v1(43.52,46.1) v1(43.62,47.93) v1(43.67,63.68) v1(43.72,61.21) v1(43.8,40.26) v1(44.48,49.73) v1(45.27,40.92) v1(45.27,39.5) v1(47.84,50.24) v1(47.81,48.92) v1(47.84,45.95) v1(47.76,44.15) v1(48.93,55.73) v1(49.21,63.53) v1(49.26,61.06) v1(50.3,49.07) v1(50.48,50.19) v1(50.67,26.97) v1(50.75,24.64) v1(50.72,22.56) v1(50.72,19.94) v1(50.7,17.58) v1(50.75,9.7) v1(50.75,6.05) v1(50.83,7.7) v1(50.83,4.11) v1(51.66,2.95) v1(52.03,63.53) v1(52.08,61.06) v1(52.07,5.38) v1(52.84,41.33) v1(52.78,9.47) v1(52.79,7.24) v1(52.76,2.06) v1(52.92,3.33) v1(53.2,4.47) v1(53.53,51.1) v1(53.5,1.04) v1(53.73,55.63) v1(53.7,5.41) v1(54.23,8.15) v1(54.16,2.08) v1(54.34,3.23) v1(54.54,41.33) v1(54.69,6.35) v1(54.82,4.6) v1(54.95,0.99) v1(55,58.6) v1(55.04,9.88) v1(55.46,55.6) v1(55.68,5.36) v1(55.84,8.2) v1(55.76,3.91) v1(55.76,2.01) v1(55.99,7.04) v1(56.12,41.3) v1(56.27,0.99) v1(56.52,5.84) v1(57.23,7.42) v1(57.33,22.81) v1(57.53,29.84) v1(57.51,9.68) v1(57.82,58.6) v1(57.82,6.07) v1(57.91,23.42) v1(58.02,61.54) v1(58.12,63.73) v1(58.12,45.75) v1(58.2,44.75) v1(58.45,7.54) v1(58.9,31.52) v1(58.93,29.87) v1(59.23,15.44) v1(59.18,12.32) v1(59.16,9.83) v1(59.21,5.99) v1(59.27,59.74) v1(59.47,45.92) v1(59.62,7.37) v1(59.88,44.75) v1(60,5.79) v1(60.15,63.5) v1(60.21,8.56) v1(60.36,58.5) v1(60.36,50.62) v1(60.36,49.25) v1(60.54,61.44) v1(60.46,52.22) v1(60.79,7.11) v1(60.84,0.86) v1(61.04,5.51) v1(61.14,9.5) v1(61.6,6.83) v1(61.73,1.57) v1(62.24,8.38) v1(62.26,36.12) v1(62.26,34.06) v1(62.26,32.33) v1(62.26,30.35) v1(62.42,39.27) v1(62.43,16.76) v1(62.36,0.89) v1(62.59,6.4) v1(62.59,5.36) v1(62.85,1.93) v1(63,59.84) v1(63.02,27.05) v1(63.15,61.8) v1(63.23,51.23) v1(63.15,49.96) v1(63.23,48.08) v1(63.8,26.82) v1(64.04,0.86) v1(64.29,58.7) v1(64.34,16.84) v1(64.52,60.48) v1(64.73,35.97) v1(64.68,34.16) v1(64.7,31.88) v1(64.65,30.07) v1(64.9,61.65) v1(64.88,39.19) v1(64.88,1.85) v1(65.15,8.84) v1(65.18,6.88) v1(65.28,10.77) v1(65.51,16.92) v1(65.58,17.83) v1(65.56,0.76) v1(65.82,28.85) v1(66.78,8.66) v1(67.14,31.83) v1(67.09,30.02) v1(67.14,26.14) v1(67.17,39.14) v1(67.24,35.97) v1(67.19,34.16) v1(67.19,27.94) v1(67.29,61.59) v1(67.39,60.33) v1(67.62,59.46) v1(67.77,63.73) v1(68.1,17.78) v1(68.05,6.76) v1(68.18,47.62) v1(68.33,46.74) v1(68.33,25.22) v1(68.58,16.38) v1(69.43,28.09) v1(69.37,26.21) v1(69.48,29.9) v1(69.55,39.19) v1(69.71,8.61) v1(70.01,51.89) v1(70.01,49.96) v1(70.09,60.35) v1(70.52,63.68) v1(70.64,61.06) v1(70.79,17.63) v1(70.87,28.96) v1(70.9,26.97) v1(70.9,25.2) v1(70.92,15.98) v1(70.98,50.95) v1(70.98,47.07) v1(71.17,9.55) v1(71.71,39.19) v1(71.94,49.94) v1(71.99,51.94) v1(72.02,47.04) v1(72.09,29.9) v1(72.91,8.71) v1(73.11,31.09) v1(73.16,63.65) v1(73.23,16.97) v1(73.26,5.51) v1(73.61,15.82) v1(73.67,48.16) v1(74.86,47.96) v1(75.57,63.6) v1(76,12.27) v1(75.95,5.54) v1(75.98,0.69) v1(76.96,14.48) v1(77.43,33.05) v1(77.45,55.47) v1(77.5,38.86) v1(77.5,36.78) v1(77.45,34.98) v1(77.45,31.19) v1(77.5,29.34) v1(77.5,27.33) v1(77.55,25.5) v1(77.6,20.04) v1(77.78,3.99) v1(77.81,2.01) v1(77.93,17.6) v1(78,11.71) v1(78.24,0.69) v1(78.62,47.29) v1(78.93,33.1) v1(79,38.91) v1(79,36.83) v1(78.95,35.03) v1(78.95,31.24) v1(79,29.39) v1(79,27.38) v1(79.03,21.56) v1(79.1,63.5) v1(79.1,56.79) v1(79.05,25.55) v1(79.05,19.66) v1(79.18,61.77) v1(79.28,46.79) v1(79.64,53.47) v1(79.74,56.36) v1(79.83,12.24) v1(79.87,3.94) v1(79.89,2.08) v1(80.32,0.69) v1(81.21,6.12) v1(81.41,11.05) v1(81.64,63.47) v1(81.62,15.21) v1(81.69,61.8) v1(81.67,53.52) v1(82.05,3.89) v1(82.2,0.64) v1(82.28,16.41) v1(82.25,13.79) v1(82.41,7.75) v1(82.66,52.45) v1(82.71,10.44) v1(82.91,55.45) v1(82.85,12.93) v1(83.42,59.59) v1(83.4,57.38) v1(83.47,5.54) v1(84.03,14.81) v1(84.44,63.4) v1(84.36,61.7) v1(84.74,16.41) v1(84.67,7.32) v1(84.95,56.97) v1(85.2,53.31) v1(85.58,58.5) v1(85.58,48.06) v1(85.6,11.63) v1(85.81,14.81) v1(86.19,5.94) v1(87.26,16.46) v1(87.41,48.03) v1(87.76,58.52) v1(88.25,5.84) v1(88.63,11.18) v1(88.76,53.39) v1(89.11,55.52) v1(89.11,51.21) v1(89.14,48.49) v1(89.14,8.81) v1(89.19,15.9) v1(89.21,13.56)
BTN1: length 11.1
  TOP w0.203: U3.9 68.22,41.96 68.01,42.16 67.37,42.16 66.94,42.6 66.25,42.6 65.84,43 65.16,43 64.75,43.41 63.91,43.41 62.83,44.49 62.01,44.49 61.81,44.7 J10.1
  BOTTOM w0.203: R50.2 61.37,45.27 J10.1
BTN2: length 10.9
  TOP w0.203: U3.8 69.49,41.99 69.33,42.14 68.64,42.14 68.21,42.57 67.55,42.57 67.11,43 66.43,43 66.02,43.41 65.34,43.41 64.93,43.81 64.09,43.81 63.06,44.85 J10.2
  BOTTOM w0.203: R51.2 62.9,45.54 J10.2
BTN3: length 11.1
  TOP w0.203: U3.7 70.76,41.95 70.54,42.16 69.91,42.16 69.53,42.55 68.82,42.55 68.38,42.98 67.72,42.98 67.29,43.41 66.61,43.41 66.2,43.81 65.51,43.81 65.11,44.22 64.51,44.22 64.31,44.42 J10.3
  BOTTOM w0.203: J10.3 64.42,45.6 R52.2
BTN4: length 11.3
  TOP w0.203: U3.6 72.03,41.96 71.82,42.16 71.13,42.16 70.72,42.57 70.09,42.57 69.71,42.95 68.99,42.95 68.56,43.38 67.9,43.38 67.47,43.81 66.78,43.81 66.38,44.22 65.79,44.22 65.56,44.45 J10.4
  BOTTOM w0.203: J10.4 65.95,45.32 R53.2
BUZZER: length 12.8
  TOP w0.203: v1(63.39,22.07) 63.14,22.33 U3.26
  BOTTOM w0.203: v1(63.39,22.07) 64.16,21.3 64.16,18.14 63.78,17.75 61.8,17.75 61.47,17.42 61.47,16.46 61.16,16.15 R34.1
D+: length 7.8
  TOP w0.254: J8.A6 73.41,58.14 73.16,58.39 72.63,58.39 72.41,58.18 J8.B6 72.41,55.82 70.97,54.38 U4.4
D-: length 8.5
  TOP w0.254: v1(70.77,55.19) 70.47,54.89 U4.5 ; J8.A7 72.91,55.72 73.18,55.45 v1(73.42,55.45) 73.66,55.45 73.91,55.7 J8.B7
  BOTTOM w0.254: v1(70.77,55.19) 71.03,55.45 v1(73.42,55.45)
DTR: length 6.8
  TOP w0.203: R14.1 78.66,52.24 Q2.2 77.83,53.09 77.55,53.37 74.86,53.37 73.95,52.45 U4.28
EN: length 23.2
  TOP w0.203: U3.3 v1(75.84,39.88) ; v1(82.48,49.3) 83.25,50.07 R11.1 84.03,50.94 Q1.3 ; Q1.3 85.9,51.3 SW2.2 ; Q1.3 84.03,51.65 C8.1
  BOTTOM w0.203: v1(75.84,39.88) 75.84,40.49 77.26,41.91 77.26,49.1 77.46,49.3 v1(82.48,49.3)
IO0_BOOT: length 82.1
  TOP w0.203: v1(63.32,25.63) 62.79,25.63 61.87,24.71 U3.25 61.87,22.13 62.69,21.31 66.29,21.31 66.68,20.92 66.68,16.45 69.75,13.39 80.73,13.39 82.37,11.75 C9.1 R12.1 85.74,10.55 85.95,10.35 SW1.2 ; Q2.3 v1(75.54,52.63)
  BOTTOM w0.203: v1(63.32,25.63) 63.32,24.97 64.08,24.21 71.61,24.21 72.09,24.69 72.09,27.91 74.33,30.15 74.33,40.73 76.03,42.44 76.03,48.87 75.83,49.07 74.58,49.07 73.87,49.78 73.87,52.32 74.38,52.83 75.34,52.83 v1(75.54,52.63)
LED: length 27.1
  TOP w0.203: U3.10 66.95,41.99 66.74,42.19 66.07,42.19 65.67,42.6 64.98,42.6 64.57,43 63.74,43 62.65,44.09 61.46,44.09 61.07,44.48 61.07,46.63 61.79,47.36 D10.2
LORA_IO0: length 11.2
  TOP w0.203: v1(58.61,17.6) 59.36,18.35 59.36,24.08 60.62,25.34 U3.24
  BOTTOM w0.203: R25.1 v1(58.61,17.6) R22.2
LORA_MISO: length 7.1
  TOP w0.203: U6.10 73.69,20.6 73.11,21.18 70.54,21.18 69.49,22.24 U3.31
LORA_MOSI: length 11.5
  TOP w0.203: U3.37 77.11,21.39 76.9,21.18 74.89,21.18 74.68,20.98 74.68,18.49 74.43,18.24 71.94,18.24 71.69,18.49 U6.11
LORA_RST: length 13.7
  TOP w0.203: U6.14 65.69,20.7 65.49,20.9 62.18,20.9 60.92,22.17 60.92,24.54 61.98,25.6 61.98,27.36 61.54,27.8 U3.23
LORA_SCK: length 4.5
  TOP w0.203: U3.30 68.22,22.27 69.69,20.79 U6.12
LORA_SS: length 4.2
  TOP w0.203: U3.29 66.95,21.9 67.69,21.16 U6.13
N15797829_RELAY: length 5.4
  BOTTOM w0.762: R36.1 9.13,39.45 D12.A 11.03,37.55 Q4.3
N15797829_RELAY1: length 5.3
  BOTTOM w0.762: Q6.3 21.31,37.56 D14.A 19.38,39.5 R42.1
N15797829_RELAY2: length 5.3
  BOTTOM w0.762: Q5.3 31.61,37.56 D13.A 29.63,39.55 R39.1
N15797829_RELAY3: length 5.4
  BOTTOM w0.762: Q7.3 41.93,37.55 D15.A 39.89,39.6 R45.1
N15797919_RELAY: length 3.4
  BOTTOM w0.203: R37.1 R38.1 12.97,33.67 12.63,33.32 Q4.1
N15797919_RELAY1: length 3.4
  BOTTOM w0.203: R43.1 R44.1 23.34,33.72 22.99,33.38 Q6.1
N15797919_RELAY2: length 3.4
  BOTTOM w0.203: R40.1 R41.1 33.62,33.72 33.28,33.38 Q5.1
N15797919_RELAY3: length 3.4
  BOTTOM w0.203: Q7.1 43.62,33.35 43.96,33.69 R47.1 R46.1
RELAY1: length 56.1
  TOP w0.203: v1(16.11,35.27) 25.42,35.27 26.25,34.44 35.67,34.44 36.56,33.55 50.2,33.55 51.42,34.77 51.42,41.63 52.25,42.46 61.28,42.46 61.87,41.87 U3.14
  BOTTOM w0.203: R37.2 v1(16.11,35.27)
RELAY2: length 47.1
  TOP w0.203: U3.13 63.14,41.85 62.12,42.87 52.07,42.87 51.01,41.81 51.01,34.95 50.02,33.96 36.76,33.96 35.85,34.87 26.83,34.87 v1(26.39,35.32)
  BOTTOM w0.203: R43.2 v1(26.39,35.32)
RELAY3: length 38.5
  TOP w0.203: U3.12 64.41,41.99 64.2,42.19 63.38,42.19 62.3,43.27 51.89,43.27 50.6,41.99 50.6,35.13 49.84,34.37 37.03,34.37 36.67,34.73 v1(36.67,35.32)
  BOTTOM w0.203: R40.2 v1(36.67,35.32)
RELAY4: length 29.1
  TOP w0.203: U3.11 65.68,41.99 65.47,42.19 64.8,42.19 64.4,42.6 63.56,42.6 62.47,43.68 51.71,43.68 50.2,42.16 50.2,35.31 49.66,34.77 47.32,34.77 46.81,35.28 v1(46.72,35.28)
  BOTTOM w0.203: R46.2 46.71,35.29 v1(46.72,35.28)
RS485_A: length 21.9
  BOTTOM w0.381: J6.2 50.45,45.82 D16.2 D18.1 ; J6.2 50.98,43.51 51.36,43.13 R1.2 ; J6.2 51.67,45.98 D18.1 ; D18.1 51.67,48.84 52.33,49.5 54.32,49.5 54.7,49.89 54.7,52.1 54.32,52.48 U1.6 50.6,52.48 50.22,52.86 R3.2
RS485_B: length 19
  BOTTOM w0.381: J6.1 56.6,45.83 D17.2 ; J6.1 55.38,45.97 D18.2 55.38,49.45 ; J6.1 56.06,43.51 55.68,43.13 R1.1 ; 55.38,49.45 55.38,53.37 55,53.75 U1.7 ; 55.38,49.45 R5.1
RST: length 9.9
  TOP w0.203: U4.24 73.99,50.45 74.28,50.16 74.28,49.63 74.53,49.38 80.16,49.38 80.41,49.63 R15.2 81.17,50.57 Q1.2
RX: length 27.2
  TOP w0.203: v1(75.05,50.18) 75.05,50.46 74.56,50.95 U4.25
  BOTTOM w0.203: R10.2 74.68,29.34 75.14,29.79 75.14,40.38 76.84,42.08 76.84,49.43 76.39,49.89 75.34,49.89 v1(75.05,50.18)
RXD0: length 2.4
  TOP w0.203: U3.34 v1(73.3,24.61)
  BOTTOM w0.203: v1(73.3,24.61) 73.3,25.68 R13.1
SCL: length 37.5
  TOP w0.203: J3.2 J4.2 53.9,12.62 R29.2 ; U3.36 75.84,22.28 75.63,22.07 v1(74.81,22.07)
  BOTTOM w0.203: J4.2 53.88,12.65 R54.2 ; J3.2 57.61,12.53 57.81,12.74 57.81,15.67 57.51,15.98 57.51,19.28 57.99,19.76 58.5,19.76 58.7,19.96 U9.6 58.78,21.18 58.78,22.76 59.82,23.8 73.08,23.8 v1(74.81,22.07)
SDA: length 39
  TOP w0.203: R30.2 53.81,11.1 J4.1 J3.1 ; U3.33 72.03,22.21 72.25,22 73.34,22 v1(73.82,21.51)
  BOTTOM w0.203: R31.2 53.81,11.1 J4.1 ; v1(73.82,21.51) 73.82,22.47 72.9,23.39 60.73,23.39 59.97,22.63 U9.5 59.97,20.09 59.23,19.35 58.17,19.35 57.91,19.1 57.91,16.15 58.22,15.85 58.22,11.66 57.84,11.28 J3.1
TX: length 29.9
  TOP w0.203: U4.26 74.54,51.45 74.68,51.6 v1(74.68,52.15)
  BOTTOM w0.203: R13.2 73.16,28.4 74.73,29.97 74.73,40.56 76.44,42.26 76.44,49.25 76.21,49.48 74.76,49.48 74.28,49.96 74.28,51.74 v1(74.68,52.15)
TXD0: length 2.4
  TOP w0.203: U3.35 v1(74.57,24.61)
  BOTTOM w0.203: R10.1 74.57,25.7 v1(74.57,24.61)
N15649130: length 3.9
  BOTTOM w0.203: 54.38,26.5 U9.1
  BOTTOM w0.508: 54.38,26.5 53.38,26.5 53.18,26.3 Y1.2
N15649228: length 8.6
  BOTTOM w0.203: 57.23,27.69 57.2,27.71 54.14,27.71 53.84,27.41
  BOTTOM w0.254: U9.2 57.43,27.48 57.23,27.69
  BOTTOM w0.508: 53.84,27.41 52.07,27.41 51.88,27.21 Y1.1
N15649288: length 8.5
  BOTTOM w0.508: C33.1 53.69,23.61 J9.1 53.87,24.08 54.38,24.59 58.19,24.59 58.7,25.1 U9.3
N15674543: length 22.7
  TOP w0.203: v1(44.58,54.99) 45.04,54.53 57.84,54.53 v1(58.43,55.12)
  BOTTOM w0.203: U2.9 42.73,50.62 44.31,52.2 44.31,54.71 v1(44.58,54.99) ; U1.1 57.42,55.12 v1(58.43,55.12) R2.2
N15674655: length 26.8
  TOP w0.203: v1(58.53,51.21) 58.53,52.25 57.08,53.7 44.38,53.7 43.59,52.91 v1(43.59,52.5)
  BOTTOM w0.203: 42.12,51.89 42.12,51.89 ; 42.12,51.89 U2.10 38.79,51.89 ; 42.12,51.89 42.98,51.89 v1(43.59,52.5) ; R7.2 38.79,51.89 ; 38.79,51.89 37.09,51.89 D4.2 ; U1.4 v1(58.53,51.21)
N15674667: length 8.1
  BOTTOM w0.203: C4.1 34.98,55.55 35.24,55.8 D4.1 38.79,55.8 ; 38.79,55.8 R7.1 ; 38.79,55.8 40.97,55.8 U2.13
N15674675: length 20.8
  TOP w0.203: v1(58.38,53.59) 57.87,54.1 43.11,54.1 v1(42.91,53.9)
  BOTTOM w0.203: R4.1 v1(58.38,53.59) 57.47,53.59 U1.2 U1.3 ; U2.12 42.37,54.43 v1(42.91,53.9)
N15674829: length 8.5
  BOTTOM w0.203: U2.8 42.12,49.35 44.76,51.99 44.76,54.03 45.17,54.43 U2.3
N15675017: length 11.7
  BOTTOM w0.203: U2.6 45.42,50.62 45.17,50.88 45.17,53.64 45.35,53.82 47.08,53.82 47.86,54.6 47.86,57.48 47.51,57.84 R8.1
N15675087: length 12.8
  BOTTOM w0.203: U2.11 43.24,53.16 43.59,53.52 43.59,55.32 43.97,55.7 U2.2 47.2,55.7 47.45,55.96 47.45,57.3 47.02,57.73 46.24,57.73 45.98,57.99 R9.1
N15728950: length 1.2
  TOP w0.254: R32.2 D10.1
N15737205: length 12.6
  BOTTOM w0.508: B1.1 75.74,15.09 75.23,14.58 D11.2 67.18,15.54 R33.2
N15737229: length 13.2
  BOTTOM w0.508: B1.2 75.74,10.36 75.23,10.87 D11.1 66.86,10.87 66.5,11.23 Q3.3
N15737285: length 3.1
  BOTTOM w0.508: R34.2 R35.1 64.06,11.93 Q3.1
N15759470: length 2.2
  TOP w1.016: U5.3 61.03,2.95 U6.1
N15759516: length 4.6
  TOP w0.203: v1(63.47,18.44) 63.47,19.39 U6.15
  BOTTOM w0.203: R22.1 63.35,18.31 v1(63.47,18.44)
N15759538: length 8
  TOP w0.254: R24.1 70.94,1 70.57,0.64 67.37,0.64 66.15,1.85 66.15,3.15 U6.3
N15759564: length 2.2
  TOP w0.254: U6.4 68.14,3.15 R23.1
N15759656: length 24.5
  TOP w0.203: v1(71.69,4.72) U6.6
  BOTTOM w0.203: v1(71.69,4.72) 71.69,5.31 71.44,5.56 64.22,5.56 63.7,6.08 63.7,10.46 63.49,10.67 60.55,10.67 60.21,11.01 R25.2 v1(60.78,16.84)
N15759710: length 5.5
  TOP w0.254: U6.7 73.46,3.61 73.21,3.35 73.21,2.72 72.96,2.46 70.06,2.46 69.74,2.15 R23.2
N15759734: length 5
  TOP w0.254: U6.8 75.57,3.49 75.57,1.83 75.32,1.57 R24.2
N15854375: length 45.3
  TOP w0.203: v1(48.14,35.74) 48.14,36.38 49.38,37.62 49.38,41.97 48.85,42.49 48.85,51.23 v1(48.8,51.28) ; U3.27 v1(64.41,24.94)
  BOTTOM w0.203: v1(48.14,35.74) 47.84,35.43 47.84,35.03 47.83,35.03 47.83,29.82 49.53,28.12 63.9,28.12 64.82,27.2 64.82,25.36 v1(64.41,24.94) ; v1(48.8,51.28) 48.51,51.57 R21.1
N15854391: length 2.9
  BOTTOM w0.203: R21.2 47.9,53.16 U2.4 U2.5
N15854393: length 6.3
  BOTTOM w0.203: U2.1 45.35,56.97 44.91,57.4 44.91,59.74 44.7,59.96 R20.2 43.96,59.97 R6.2
N15855154: length 62.8
  TOP w0.203: U3.28 v1(65.68,24.92) ; v1(49.05,36.25) 49.05,36.71 49.78,37.44 49.78,42.15 49.26,42.67 49.26,50.7 49.49,50.93 49.49,52.76 49.05,53.19 44.48,53.19 44.28,52.98 44.28,52.2 43.9,51.82 43.29,51.82 42.91,52.2 42.91,52.91 42.22,53.59 42.22,54.2 42.6,54.58 43.7,54.58 43.9,54.79 43.9,56.18 44.1,56.39 v1(44.79,56.39)
  BOTTOM w0.203: v1(65.68,24.92) 65.23,25.36 65.23,27.38 64.09,28.52 49.72,28.52 48.24,30 48.24,34.85 49.05,35.66 v1(49.05,36.25) ; R20.1 44.14,58.36 44.48,58.01 44.48,56.69 v1(44.79,56.39)
N15856484: length 7.7
  TOP w2.286: R36.4 v1(10.4,21.13) J5.1
  BOTTOM w2.286: J5.1 v1(10.4,21.13) R36.4
N15856490: length 27.2
  TOP w2.286: R36.3 v1(10.47,28.68) v1(11.91,27.24) v1(13.32,25.83) v1(14.74,24.41) v1(14.74,22.12) v1(14.74,19.82) J5.2
  BOTTOM w2.286: R36.3 v1(10.47,28.68) v1(11.91,27.24) v1(13.32,25.83) v1(14.74,24.41) v1(14.74,22.12) v1(14.74,19.82) J5.2
N15856535: length 27.1
  TOP w2.286: R42.3 v1(20.79,28.61) v1(22.29,27.11) v1(23.51,25.9) v1(24.72,24.68) v1(24.72,22.3) v1(24.72,19.99) J5.4
  BOTTOM w2.286: J5.4 v1(24.72,19.99) v1(24.72,22.3) v1(24.72,24.68) v1(23.51,25.9) v1(22.29,27.11) v1(20.79,28.61) R42.3
N15860706:
  vias: v1(10.65,48.08) v1(10.65,46.56) v1(10.7,44.96) v1(11.49,48.97) v1(11.97,46.53) v1(12.45,48.06) v1(13.32,48.97) v1(13.95,48.08)
N15877200: length 1
  TOP w0.203: Q1.1 81.24,52.1 R14.2
N15877354: length 1.1
  TOP w0.203: R15.1 78.58,50.34 Q2.1
N15882155: length 4.7
  TOP w0.203: R17.2 66.89,48.08 67.09,48.29 67.09,49.3 67.62,49.83 67.62,50.75 67.83,50.95 U4.11
N15882358: length 4
  TOP w0.254: U4.8 68.26,52.45 68.05,52.65 R16.2 R18.1
N15882934: length 6.8
  TOP w0.203: U4.9 67.5,51.95 67.22,51.67 67.22,50.01 66.81,49.61 C13.1 66.2,49.89 65.69,50.39 65.16,50.39 64.6,50.95 R19.1
N15886999: length 17.4
  BOTTOM w0.508: J8.SH3 J8.SH1 76.96,62.24 C12.1 69.36,62.24 J8.SH2 J8.SH4
N15887556: length 2
  TOP w0.254: R48.1 74.72,55.74 74.41,56.05 J8.A5
N15888167: length 3
  TOP w0.254: R49.1 69.72,55.26 70.39,55.93 71.16,55.93 71.41,56.18 J8.B5
N15920757: length 33.5
  TOP w1.27: v1(23.05,45.12) C31.1 ; v1(23.05,45.12) v1(23.05,44.09) 22.59,44.09 C31.1 ; v1(23.05,45.12) v1(23.05,46.13) 22.58,46.13 C31.1 ; C31.1 21.57,45.11 D8.2
  BOTTOM w0.635: R26.1 18.6,52.88 U7.6
  BOTTOM w1.016: R26.1 18.09,46.08 19.06,45.12 22.02,45.12
  BOTTOM w1.27: v1(23.05,45.12) v1(23.05,46.13) 23.03,46.13 22.02,45.12 ; v1(23.05,45.12) 22.02,45.12 ; v1(23.05,45.12) v1(23.05,44.09) 22.02,45.12
N15920801: length 9.3
  BOTTOM w0.508: U7.2 27.63,54.15 C22.1 28.7,54.11 30.06,55.47 D9.C
  BOTTOM w0.762: D9.C 30.06,60.19 L1.1
N15920825: length 46.3
  TOP w0.762: 25.38,56.92 24.62,57.68 v1(24.62,58.09) v1(25.38,58.09) ; 25.38,56.92 v1(25.38,58.09) ; 25.38,56.92 26.14,57.68 v1(26.14,58.09) v1(25.38,58.09) ; 25.38,56.92 25.38,49.53 ; v1(26.37,47.73) 26.37,45.66 26.91,45.12 C17.1 32.37,45.12 34.42,47.17 C18.1 L2.1 ; v1(26.37,47.73) 25.38,48.72 25.38,49.53 ; v1(26.37,47.73) v1(26.37,48.54) 25.38,49.53
  BOTTOM w0.762: C23.1 R27.1 25.56,48.54 ; v1(25.38,58.09) 25.38,60.19 ; v1(25.38,58.09) v1(24.62,58.09) 24.62,59.43 25.38,60.19 ; v1(25.38,58.09) v1(26.14,58.09) 26.14,59.44 L1.2 25.38,60.19 ; 25.56,48.54 v1(26.37,47.73) v1(26.37,48.54) 25.56,48.54
N15920977: length 9.2
  BOTTOM w0.508: U7.8 U7.7
  BOTTOM w0.635: U7.1 U7.8 R26.2
N15921109: length 5.4
  BOTTOM w0.762: U7.5 20.64,50.49 20.99,50.14 R28.1 C23.2 R27.2
N15921113: length 1.6
  BOTTOM w0.508: C24.1 27.63,52.88 U7.3
N15922447: length 7.6
  TOP w2.286: R42.4 v1(20.56,21.22) J5.3
  BOTTOM w2.286: J5.3 v1(20.56,21.22) R42.4
N15922496: length 8.2
  TOP w2.286: J7.1 31.47,20.56 v1(31.08,20.96) R39.4
  BOTTOM w2.286: J7.1 31.47,20.56 v1(31.08,20.96) R39.4
N15922505: length 27.6
  TOP w2.286: R39.3 v1(31,28.66) v1(32.63,27.03) v1(34.24,25.42) v1(35.67,23.99) v1(35.67,21.79) v1(35.67,19.96) J7.2
  BOTTOM w2.286: J7.2 v1(35.67,19.96) v1(35.67,21.79) v1(35.67,23.99) v1(34.24,25.42) v1(32.63,27.03) v1(31,28.66) R39.3
N15922517: length 27.6
  TOP w2.286: J7.4 v1(46.71,21.08) v1(46.71,23.2) v1(44.95,24.96) v1(43.14,26.77) v1(41.47,28.44) R45.3
  BOTTOM w2.286: R45.3 v1(41.47,28.44) v1(43.14,26.77) v1(44.95,24.96) v1(46.71,23.2) v1(46.71,21.08) J7.4
N15922524: length 8.1
  TOP w2.286: R45.4 v1(41.27,21.02) 41.63,20.66 J7.3
  BOTTOM w2.286: J7.3 41.63,20.66 v1(41.27,21.02) R45.4
N156751311: length 1.2
  BOTTOM w0.254: D5.1 R8.2
N156751471: length 1.2
  BOTTOM w0.254: D6.1 R9.2

## Copper pours and planes (outline as drawn; the poured copper is in the pictures)
+3.3V on TOP (solid shape): 77.55,46.02 77.55,40.28 77.53,40.26 76.69,40.26 76.66,40.28 76.66,42.67 76.39,42.95 73.72,42.95 73.52,43.15 73.52,46.08 73.69,46.25 77.33,46.25
+3.3V on BOTTOM (solid shape): 57.21,39.19 59.82,39.19 59.9,39.12 59.9,37.34 59.75,37.19 58.43,37.19 58.12,36.88 58.12,34.47 57.92,34.26 55.71,34.26 55.63,34.19 55.63,31.5 55.56,31.42 54.24,31.42 54.13,31.52 54.13,34.19 54.06,34.26 51.95,34.26 51.75,34.47 51.75,39.37 52.31,39.93 56.47,39.93
GND on TOP: 53.04,0.25 50.22,3.07 50.22,32 46.44,35.79 0.39,35.79 0.25,35.92 0.25,64.24 89.75,64.24 89.75,47.5 79.75,47.5 79.75,16.99 89.75,16.99 89.75,0.25 ; 8 cut-outs
GND on BOTTOM: 53.04,0.25 50.22,3.07 50.22,32.03 48.12,34.14 2.04,34.14 0.25,35.92 0.25,64.24 89.75,64.24 89.75,47.5 79.75,47.5 79.75,16.99 89.75,16.99 89.75,0.25 ; 13 cut-outs
VBUS on TOP (solid shape): 81.67,59.97 81.67,58.17 81.64,58.14 79.59,58.14 78.77,58.95 76,58.95 75.52,58.47 75.52,57.81 75.85,57.48 75.85,56.46 75.83,56.44 75.29,56.44 75.27,56.46 75.27,57.56 74.85,57.98 74.85,58.74 74.48,59.11 72.09,59.11 71.6,58.61 71.6,58.1 71.05,57.56 71.05,56.46 71.03,56.44 70.49,56.44 70.47,56.46 70.47,57.45 70.9,57.89 70.9,59.26 71.61,59.97 74.35,59.97 74.71,60.33 81.31,60.33
N15860706 on TOP (solid shape): 14.64,51.13 14.64,47.88 14.21,47.45 13.52,47.45 12.5,46.43 12.5,44.5 12.43,44.42 10.47,44.42 10.24,44.65 10.24,51.31 10.35,51.41 14.36,51.41
N15860706 on BOTTOM (solid shape): 14.64,51.13 14.64,47.88 14.21,47.45 13.52,47.45 12.5,46.43 12.5,44.5 12.43,44.42 10.47,44.42 10.24,44.65 10.24,51.31 10.35,51.41 14.36,51.41

Small or netless copper shapes (teardrops, artwork), in the pictures only: 322 on TOP, 308 on BOTTOM

## Text on the board
Ref Des/Silkscreen Bottom: 3.3 | GATEWAY | 29/08/2025 | Design by HTR | Ver | Name | Date | RESET | BOOT
Ref Des/Silkscreen Top: GND | OUT | CH1 | IN | CH2 | CH3 | +5V | CH4 | VCC | SCL | SDA | BT | 1 | 2 | 3 | 4 | G | A | B
PLACE_BOUND_BOTTOM: FIGURE | FINISHED_SIZE | 15.0 | 20.0 | 23.598 | 32.0 | 42.0 | 52.0 | 54.0 | 82.677 | 27.559 | 57.087x25.591 | 68.898x25.591 | 118.0x39.0 | 138.0x39.0 | DRILL CHART: TOP to BOTTOM | ALL UNITS ARE IN MILS | PLATED | NON-PLATED | QTY | 462 | 15 | 2 | 4 | 3 | 16 | 12 | 1
